# Altium PCB USBPhyRW20180110.PcbDoc
Units mil, origin at the board's own origin, x right, y up, seen from the top; angles counter-clockwise.
Board outline 2170 x 955 mil, 2 copper layers (Top Layer, Bottom Layer); 40 components, 26 nets, 144 pads, 49 vias.
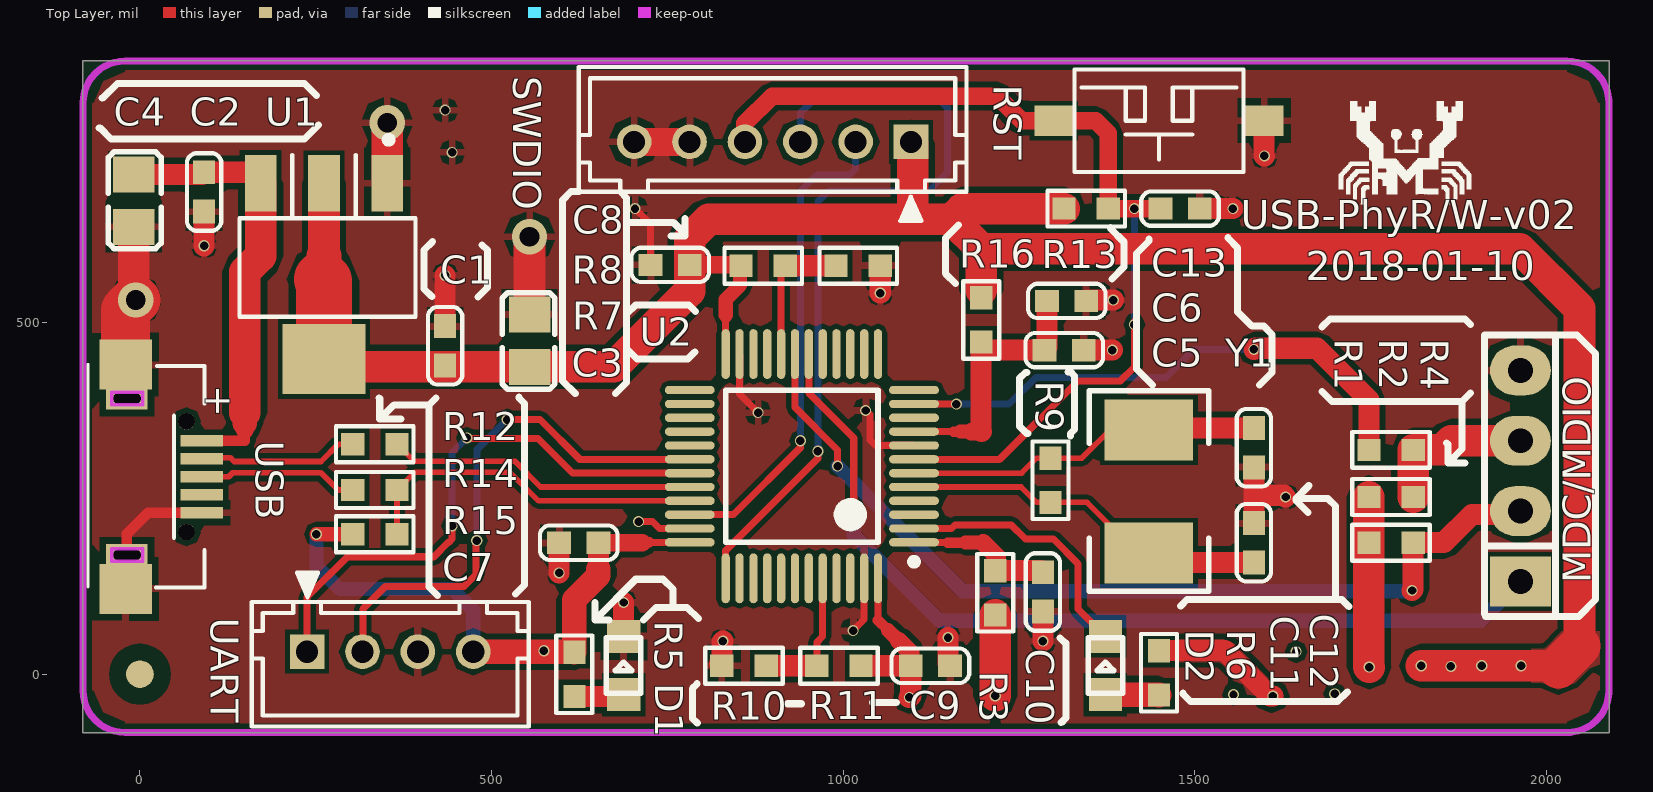
[diagram p0: Top Layer view]
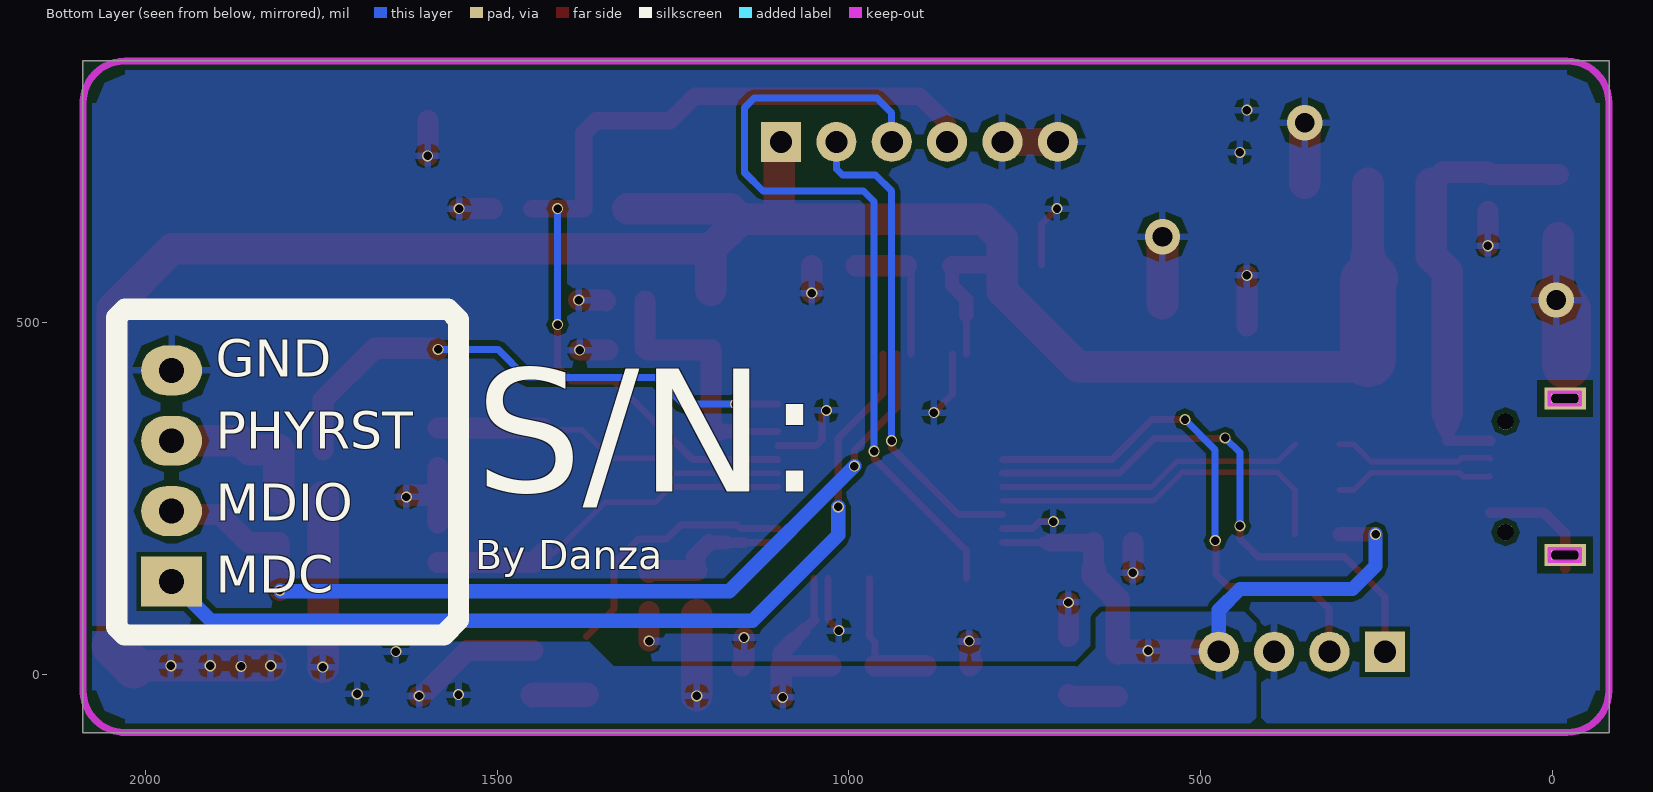
[diagram p1: Bottom Layer view, seen from below]

## Layer stack, top to bottom
Top Solder: solder mask 0.4, Solder Resist, Dk 3.5
Top Layer: signal copper 1.4
Dielectric 1: dielectric 12.6, FR-4, Dk 4.8
Bottom Layer: signal copper 1.4
Bottom Solder: solder mask 0.4, Solder Resist, Dk 3.5

## Board outline
754,872 2089,872 2089,-63 2089,-73 2089,-83 -81,-83 -81,862 -81,872

## Design rules (kind name [scope] priority, off if disabled: settings)
Clearance [All] p1: gap=7
ComponentClearance [All] p1: gap=3 collisioncheckmode=3 verticalgap=7 showdistances=FALSE
DiffPairsRouting [All] p1: maxlimit=8 minlimit=8 mostfreqgap=8 toplayer_minwidth=8 toplayer_maxwidth=30 toplayer_prefwidth=15 bottomlayer_minwidth=8 bottomlayer_maxwidth=30 bottomlayer_prefwidth=15 maxuncoupledlength=500
PolygonConnect [All] p1: connectstyle=Relief reliefconductorwidth=10 reliefentries=4 polygonreliefangle="90 Angle" airgapwidth=10
RoutingVias [All] p1: holewidth=28 width=50 viastyle="Through Hole" minholewidth=10 minwidth=10 maxholewidth=100 maxwidth=100
SilkToSilkClearance [All] p1 off: silktosilkclearance=10
SolderMaskExpansion [All] p1: expansion=4
Width [All] p1: maxlimit=100 minlimit=8 preferedwidth=10 minimp=50.000000 maximp=50.000000 favimp=50.000000
27 further rules are at their usual default settings.

## Classes and differential pairs
component class CoreBoard: C1 C2 C3 C4 C5 C6 C7 C8 C9 C10 C11 C12 C13 D1 D2 MDC/MDIO/RST#/GND R1 R2 R3 R4 R5 R6 R7 R9 R10 R12 R13 R14 r16 RST SWDIO U1 UART USB Y1
differential pair USB_1: +NetR12_2 -NetR14_2
differential pair USB_2: +DM_PA11 -DP_PA12
differential pair CLK8M: +OSC_OUT -OSC_IN

## Components (designator, comment, footprint, x,y, rotation, side; value= is the part's Value field where it differs from the comment)
C1 "0.1uf" C0603 434,467 r90 top
C2 "0.1uf" C0603 91.24,685.74 r270 top
C3 "10uf" CAP-0805 554,437 r90 top
C4 "10uf" CAP-0805 -8.76,710.74 r270 top
C5 "1uf" C0603 1314.2,460.74 r0 top
C6 "0.1uf" C0603 1317.74,530.74 r0 top
C7 "0.1uf" C0603 624,187 r180 top
C8 "0.1uf" C0603 754,582 r180 top
C9 "0.1uf" C0603 1124,12 r0 top
C10 "0.1uf" C0603 1284,117 r270 top
C11 "20pF" C0603 1584,187 r90 top
C12 "20pF" C0603 1584,322 r90 top
C13 "0.1uf" C0603 1479,662 r180 top
D1 "LED-GREEN" LED-0805 687.74,9.76 r270 top
D2 "LED-GREEN" LED-0805 1372.74,9.76 r270 top
MDC/MDIO "CN_UART" SIP4P-2.54mm 1963,132 r0 top (schematic designator CN3)
R1 "1.5K/NC" R0603 1779,187 r180 top
R2 "50k/NC" R0603 1779,252 r0 top
R3 "0R/NC" R0603 1216.24,115.74 r270 top
R4 "0R" R0603 1779,319 r0 top
R5 "1K" R0603 617.74,-0.24 r270 top
R6 "1K" R0603 1449,2 r270 top
R7 "10K" R0603 1021.24,580.82 r180 top
R8 "10K/NC" R0603 886.24,580.82 r180 top
R9 "1M" R0603 1294.75,275.74 r270 top
R10 "10K" R0603 859,12 r0 top
R11 "10K/NC" R0603 994,12 r0 top
R12 "20R" R0603 334,327 r180 top
R13 "10K" R0603 1345.5,662 r180 top
R14 "20R" R0603 334,262 r180 top
R15 "4K7" R0603 334,199 r0 top
R16 "0R" R0603 1196.24,503.74 r270 top (schematic designator L1)
RST "KEYPAD/NC" SWITCH_T06B 1449,787 r180 top (schematic designator SW1)
SWDIO "DNP/NC" CON_SIP6BOX_2MM 1096.48,758.97 r180 top (schematic designator SWD)
U1 "LM1117-3.3V" SOT-223 269,577 r180 top
U2 "STM32F101C8T6" LQFP48_N 941.24,295.74 r180 top
UART "CN_UART/NC" CON_SIP4BOX_2MM 237.78,30.03 r0 top (schematic designator CN1)
USB "MICROUSB" MICRO-USB 1.24,280.74 r270 top
Y1 "8M" 5032-2P 1434.75,260.74 r270 top
? "Comment" MARK 0,0 r270 top

## Footprints (in the part's own frame and the unit in brackets; to place one, negate y for a bottom-side part, rotate by r counter-clockwise, add the part's x,y. Pads: shape width x height; smd on the part's side, far side on the other; paste and mask are expansions set on the pad)
5032-2P [mm]
  rect 2.2x3.2 smd: 1(-2.2,0) 2(2.25,0)
  silkscreen extent -3.62,-2.16 3.62,2.16
C0603 [mm]
  rect 0.86x0.8 smd: 1(-0.71,0) 2(0.71,0)
  silkscreen extent -1.4,-0.62 1.4,0.62
CAP-0805 [mm]
  rect 1.3x1.5 smd: 1(0,0) 2(1.9,0)
  silkscreen extent -0.82,-0.91 2.68,0.99
CON_SIP4BOX_2MM [mm]
  rect 1.25x1.25 / inner rect 1.25x1.25 / far side rect 1.45x1.45 hole 0.8: 1(0,0.05)
  round 1.25 / inner round 1.25 / far side round 1.45 hole 0.8: 2(2,0.05) 3(4,0.05) 4(6,0.05)
  silkscreen extent -2,-2.65 8,2.91
CON_SIP6BOX_2MM [mm]
  rect 1.25x1.25 / inner rect 1.25x1.25 / far side rect 1.45x1.45 hole 0.8: 1(0,0.05)
  round 1.25 / inner round 1.25 / far side round 1.45 hole 0.8: 2(2,0.05) 3(4,0.05) 4(6,0.05) 5(8,0.05) 6(10,0.05)
  silkscreen extent -2,-2.65 12,2.91
LED-0805 [mm]
  rect 1.2x1.2 smd: 1(-1.116,0.003) 2(0.984,0.003)
  silkscreen extent -1.07,-0.62 0.93,0.63
LQFP48_N [mm]
  oval 1.8x0.3 smd: 1(-4.05,2.75) 2(-4.05,2.25) 3(-4.05,1.75) 4(-4.05,1.25) 5(-4.05,0.75) 6(-4.05,0.25) 7(-4.05,-0.25) 8(-4.05,-0.75) 9(-4.05,-1.25) 10(-4.05,-1.75) 11(-4.05,-2.25) 12(-4.05,-2.75) 25(4.05,-2.75) 26(4.05,-2.25) 27(4.05,-1.75) 28(4.05,-1.25) 29(4.05,-0.75) 30(4.05,-0.25) 31(4.05,0.25) 32(4.05,0.75) 33(4.05,1.25) 34(4.05,1.75) 35(4.05,2.25) 36(4.05,2.75)
  oval 0.3x1.8 smd: 13(-2.75,-4.05) 14(-2.25,-4.05) 15(-1.75,-4.05) 16(-1.25,-4.05) 17(-0.75,-4.05) 18(-0.25,-4.05) 19(0.25,-4.05) 20(0.75,-4.05) 21(1.25,-4.05) 22(1.75,-4.05) 23(2.25,-4.05) 24(2.75,-4.05) 37(2.75,4.05) 38(2.25,4.05) 39(1.75,4.05) 40(1.25,4.05) 41(0.75,4.05) 42(0.25,4.05) 43(-0.25,4.05) 44(-0.75,4.05) 45(-1.25,4.05) 46(-1.75,4.05) 47(-2.25,4.05) 48(-2.75,4.05)
  silkscreen extent -4.18,-2.75 2.75,3.57
MARK [mm]
  round 1 smd paste-1.016 mask+0.5: ""(0,0)
  Top Layer pour cut-out: -1.109,0 -1.072,-0.287 -0.961,-0.555 -0.785,-0.785 -0.555,-0.961 -0.287,-1.072 0,-1.109 0,-1.109 0.287,-1.072 0.555,-0.961 0.785,-0.785 0.961,-0.555 1.072,-0.287 1.109,0 1.109,0 1.072,0.287 0.961,0.555 0.785,0.785 0.555,0.961 0.287,1.072 0,1.109 0,1.109 -0.287,1.072 -0.555,0.961 -0.785,0.785 -0.961,0.555 -1.072,0.287 -1.109,0
MICRO-USB [mm]
  rect 0.4x1.55 smd: 1(-1.3,2.2) 2(-0.65,2.2) 3(0,2.2) 4(0.65,2.2) 5(1.3,2.2)
  rect 1.8x1.9 smd: 6(-4.05,-0.55) 6(4.05,-0.55)
  rect 0.8x1.5 hole 0.4 slot 1 at 90 deg: 6(-2.825,-0.5) 6(2.825,-0.5)
  round 0.6 hole 0.6 unplated: ""(-2,1.65) ""(2,1.65)
  Keep-Out Layer lines w0.127: 3.054,-1.043 2.596,-1.043 2.596,0.075 3.054,0.075 3.054,-1.043 ; -2.596,-1.043 -3.054,-1.043 -3.054,0.075 -2.596,0.075 -2.596,-1.043
  silkscreen extent -4.06,-1.91 4,2.3
R0603 [mm]
  rect 0.84x0.8 smd: 1(-0.8,0) 2(0.8,0)
  silkscreen extent -1.4,-0.65 1.4,0.65
SIP4P-2.54mm [mm]
  rect 2.2x1.8 hole 0.9: 1(0,0)
  oval 2.2x1.8 hole 0.9: 2(0,2.54) 3(0,5.08) 4(0,7.62)
  silkscreen extent -1.29,-1.27 1.27,8.9
SOT-223 [mil]
  rect 45x80 smd: 1(-82.76,-121.26) 2(7.24,-121.26) 3(97.24,-121.26)
  rect 118x100 smd: 4(7.24,128.74)
  silkscreen extent -123,-188 127,69
SWITCH_T06B [mm]
  rect 1.4x1.1 smd: 1(-3.8,0) 2(3.8,0)
  silkscreen extent -3.05,-1.85 3.05,1.85

## Part data
C1 C2 C5 C6 C7 C8 C9 C10 C13: library part CAP_1, "Capacitor"
C3 C4: library part CAPACITOR, "Capacitor"
C11 C12: library part CAP, "Capacitor"
D1 D2: library part LED
MDC/MDIO UART: library part CON4
R1 R2 R3 R4 R5 R6 R7 R8 R9 R10 R11 R12 R13 R14: library part RES1
R16: library part INDUCTOR1
RST: library part PUSHBUTTON_TSKB-2L_0
SWDIO: library part CON6
U1: library part LM1117
U2: "STM32 ARM-based 32-bit MCU with 64 Kbytes Flash, 48-pin LQFP, Industrial Temperature"
Y1: library part CRYSTAL, "Crystal"

## Via types
v1: diameter 15.75, hole 12, Top Layer to Bottom Layer, 46 vias
v2: diameter 50, hole 28, Top Layer to Bottom Layer, 3 vias

## Nets (pads, with @x,y where several pads share a name; then routed paths per layer and width w, separated by ;. In a path a pad name is that pad's centre, name@x,y a point inside that pad or via, vN(x,y) a via of type N, cw(c..) or ccw(c..) an arc to the next point about the centre after c; other vN are vias at no path point)
BOOT0: R10.2 R11.1 U2.44 | length 199.7
  Top Layer w10: R11.1 962.5,45.5 970.77,53.77 U2.44
  Top Layer w30: R10.2 R11.1
BOOT1: R7.2 R8.1 U2.20 | length 200.1
  Top Layer w10: U2.20 911.72,574.8 R8.1
  Top Layer w30: R8.1 R7.2
DM_PA11: R12.1 U2.32 | length 441.5
  Top Layer w8: R12.1 389.5,303 533,303 569.79,266.21 U2.32
DP_PA12: R14.1 R15.2 U2.33 | length 506.4
  Top Layer w8: R15.2 R14.1 390.5,287 526.37,287 566.84,246.53 U2.33
GND: C1.2 C2.2 C3.2 C4.2 C5.2 C6.2 C7.2 C8.2 C9.2 C10.2 C11.2 C12.1 C13.1 D1.1 MDC/MDIO.4 R7.1 R10.1 RST.1 SWDIO.5 SWDIO.6 U1.1 U2.8 U2.23 U2.35 U2.47 UART.3 USB.5 USB.6 | length 1742.8
  Top Layer w10: v1(704,662) 726.05,639.95 C8.2 ; v1(709,217) 729,217 738.84,207.16 U2.35 ; U2.23 852.66,398.34 v1(879,372) ; v1(1014,62) 1029.83,77.83 U2.47 ; v1(1032,375) 1038,369 1038,333 1045.73,325.27 U2.8
  Top Layer w15: USB.6@-18.44,150.52 -18.44,169.52 -18.44,199.56 11.56,229.56 USB.5
  Top Layer w30: v1(91.24,609.24) C2.2 ; C1.2 v1(434,567) ; v1(596.05,144.05) C7.2 ; D1.1 v1(687.86,102) ; R10.1@824,15.5 R10.1 827.5,45.5 v1(829,47) ; v1(1052.74,542) R7.1 ; v1(1149,52) 1149,14.95 C9.2 ; v1(1284,47) C10.2 ; C5.2 v1(1382.74,460.74) ; C6.2 1346.95,532 v1(1384,532) ; C13.1 v1(1554,662) ; C11.2 1584,254.5 ; C12.1 1584,254.5 ; RST.1 1598.61,737.39 v1(1599,737) ; v1(1629,252) 1626.5,254.5 1584,254.5
  Top Layer w40: SWDIO.6 SWDIO.5
  Top Layer w45: C4.2@-8.76,620.74 -8.76,534.76 v2(-6,532) ; U1.1 v2(351.76,784.24) ; C3.2@554,527 v2(554,622)
  Top Layer w70: USB.6@-20.41,440.19 -20.41,517.59 v2(-6,532)
  other v1: 444,742 434,802
NetD1_2: D1.2 R5.2 | length 71.3
  Top Layer w30: R5.2 685.1,-31.74 D1.2
NetD2_2: D2.2 R6.2 | length 76.4
  Top Layer w35: D2.2 1448.49,-28.98 R6.2
NetQ1_1: 
NetR12_2: R12.2 USB.2 | length 227.8
  Top Layer w8: USB.2 89.53,308 128.5,308 134,302.5 257.47,302.5 281.97,327 R12.2
NetR14_2: R14.2 USB.3 | length 229
  Top Layer w8: USB.3@89.12,282 USB.3 126.24,280.74 132,286.5 257.47,286.5 281.97,262 R14.2
NRST: C13.2 R13.1 RST.2 SWDIO.4 U2.7 | length 1359.8
  Top Layer w10: U2.7 1222.58,305.58 1334,417 1394,417 1414,437 v1(1414,497) v1@1414,502
  Top Layer w25: SWDIO.4 860.26,783.26 899,822 1219,822 1254,787 RST.2 1359,787 1376.99,769.01 R13.1 v1(1414.02,662) C13.2
  Bottom Layer w10: v1(1414,497) v1(1414.02,662)
OSC_IN: C11.1 R9.2 U2.5 Y1.2 | length 527.7
  Top Layer w8: U2.5 1253.03,266.21 1275,244.24 R9.2 1346.76,244.24 1418.84,172.16 Y1.2
  Top Layer w30: Y1.2 1447.86,159.05 C11.1
OSC_OUT: C12.2 R9.1 U2.6 Y1.1 | length 509.8
  Top Layer w8: U2.6 1253.66,285.9 1275,307.24 R9.1 1339.24,307.24 1379.35,347.35 Y1.1
  Top Layer w30: Y1.1 1437.35,349.95 C12.2
PC13: D2.1 U2.2 | length 377.5
  Top Layer w10: U2.2 1154.16,207.16 1159,212 1239,212 1259,192 1299,192 1334,157 1334,92.55 D2.1
PHYRST: R4.1 U2.11 | length 781.5
  Top Layer w10: U2.11 v1@1161.32,384.32
  Top Layer w30: v1(1584,462) 1585.5,463.5 1674,463.5 1747.5,389.99 R4.1
  Bottom Layer w10: v1(1161,384) 1236,384 1274,422 1459,422 1499,462 v1(1584,462)
PHYRST#: MDC/MDIO.3 R2.2 R4.2 | length 229.5
  Top Layer w45: R2.2 R4.2 ; R4.2@1813.76,315.74 R4.2 ; MDC/MDIO.3 1865,332 1852,319 R4.2
RX1: U2.31 UART.1 | length 808.3
  Top Layer w10: UART.1 237.78,109.78 295,167 418,167 439,188 440,188 444,192 v1(444,211) ; v1(465,336) 466,335 566,335 615.1,285.9 U2.31
  Bottom Layer w10: v1(444,211) 444,315 v1(465,336)
SMIMDC: MDC/MDIO.1 U2.18 | length 1305.4
  Top Layer w10: U2.18 951.09,399.91 1015,336 v1(1015,238)
  Bottom Layer w20: v1(1015,238) 1015,198 1137,76 1907,76 MDC/MDIO.1
SMIMDIO: MDC/MDIO.2 R1.1 U2.19 | length 1315.2
  Top Layer w10: U2.19 931.4,379.6 992,319 v1(992,296)
  Top Layer w30: v1(1809,119) 1810.5,120.5 R1.1 1854,187 1894,227 1958,227 MDC/MDIO.2
  Bottom Layer w20: v1(992,296) 1170,118 1808,118 v1(1809,119)
SWCLK: SWDIO.3 U2.37 | length 1148
  Top Layer w10: U2.37 832.98,175.98 964,307 v1(964,317)
  Bottom Layer w10: SWDIO.3 939,798 960,819 1135,819 1148,806 1148,713 1122,687 979.1,687 964,671.9 v1(964,317)
SWDIO: SWDIO.2 U2.34 | length 691.9
  Top Layer w10: U2.34 843.84,226.84 939,322 v1(939,332)
  Bottom Layer w10: v1(939,332) 939,687 962,710 1009.21,710 1017.74,718.53 SWDIO.2
TX1: U2.30 UART.2 | length 763.9
  Top Layer w10: UART.2 317,32.48 317,93 349,125 461,125 478,142 478,189 v1(479,190) ; v1(522,362) 569,362 625.42,305.58 U2.30
  Bottom Layer w10: v1(479,190) 479,319 v1(522,362)
USB_5V: C2.1 C4.1 U1.3 USB.1 | length 625
  Top Layer w15: USB.1 148.92,331.92 148.92,346.92
  Top Layer w25: 148.92,346.92 148.92,356.92
  Top Layer w30: C4.1 88.29,710.74 C2.1 156.32,713.69 U1.3
  Top Layer w35: 148.92,356.92 148.92,371.92
  Top Layer w45: 148.92,371.92 148.92,426.92 149,427 149,572 171.76,594.76 U1.3
VBAT: C10.1 R3.1 U2.1 | length 216.4
  Top Layer w10: U2.1 1101.17,187 1149,187
  Top Layer w15: 1149,187 1174,187
  Top Layer w20: 1174,187 1199,187
  Top Layer w25: 1199,187 1219,167 1216.24,164.24 R3.1
  Top Layer w30: R3.1 1281.72,147.24 C10.1
VCC_3V3: C1.1 C3.1 C7.1 C8.1 C9.1 R1.2 R2.1 R3.2 R5.1 R6.1 R8.2 R11.2 R13.2 R15.1 R16.1 SWDIO.1 U1.2 U1.4 U2.24 U2.36 U2.48 UART.4 | length 5143.4
  Top Layer w10: 724.47,187.47 U2.36 ; U2.24 832.98,505.98 ; 1049.51,77 U2.48
  Top Layer w15: 714.47,187.47 724.47,187.47 ; 832.98,505.98 832.98,510.98 ; 1049.51,77 1064,62.51
  Top Layer w20: v1(251,199) R15.1 ; 714,187 714.47,187.47 ; 832.98,510.98 832.98,532.98 853.57,553.57 R8.2@853.57,582 ; 1064,62.51 1079,47.51
  Top Layer w25: C7.1 714,187 ; C8.1 853.57,582 R8.2 ; 1079,47.51 1096.05,30.46 C9.1
  Top Layer w30: 651.95,149.05 C7.1 ; R11.2 C9.1 1096.05,-30.95 v1(1094,-33) ; R6.1 1542.5,33.5 1607,-31 v1(1611,-31)
  Top Layer w35: UART.4 616.99,32 R5.1 617.74,105.74 651.95,139.95 651.95,149.05
  Top Layer w45: U1.4 273.02,437 C3.1 674,437 781.95,544.95 C8.1 781.95,619.95 809,647 1099,647 ; 261.76,594.76 U1.2 ; SWDIO.1 1099,754.48 1099,647 ; R16.1@1196.24,545.74 1196.24,604.76 ; v1(1216.24,-30.76) R3.2 ; R13.2 1169,662 1154,647 ; R2.1 R1.2 1747.5,10.5 v1(1748,10) ; v1(1822,12) v1(1908,12) v1(1964,12) 2015,12 2017,10 ; 2047,40 2047,520 1962.24,604.76 1196.24,604.76 ; 1099,647 1154,647 ; 1154,647 1196.24,604.76
  Top Layer w50: 261.76,564.24 261.76,594.76
  Top Layer w55: 259,561.49 261.76,564.24
  Top Layer w60: 2017,10 2047,40
  Top Layer w80: 259,561.49 261.76,558.73 U1.4
  Bottom Layer w20: v1(251,199) 251,154 284,121 444,121 474,91 UART.4
  other v1: 1555,-29 1699,-28 1864,11 1644,32 574.4,33.32
VDDA: C5.1 C6.1 R16.2 U2.9 | length 375.2
  Top Layer w10: U2.9 1156.95,344.95
  Top Layer w15: 1156.95,344.95 1166.95,344.95
  Top Layer w20: 1166.95,344.95 1181.95,344.95
  Top Layer w25: 1181.95,344.95 1196.95,344.95
  Top Layer w30: 1196.95,344.95 1196.24,345.66 1196.24,461.74 1197.24,460.74 C5.1 1289.79,464.28 C6.1
pads on no net: ?. U2.3 U2.4 U2.10 U2.12 U2.13 U2.14 U2.15 U2.16 U2.17 U2.21 U2.22 U2.25 U2.26 U2.27 U2.28 U2.29 U2.38 U2.39 U2.40 U2.41 U2.42 U2.43 U2.45 U2.46 USB. USB.4

## Polygon pours and split planes (outlines as drawn)
VCC_3V3 on Top Layer "VCC_3V3_L01_P018" (solid, remove dead copper, pour order 18): 1448.33,57.03 1448,56.7 1448,-70 2042,-70 2077,-35 2077,61 1452.69,61 1449,57.31
VCC_3V3 on Top Layer "VCC_3V3_L01_P016" (solid, remove dead copper, pour order 16): 1610,56 1613,59 2030,59 2068,59 2076,51 2077,50 2077,-35 2075,-35 2040,-70 2036,-74 1848,-74 1612,-74 1610,-72
GND on Top Layer "GND_L01_P010" (solid, remove dead copper, pour order 10): -81,872 -81,-83 2089,-83 2089,-77 2089,872 1933,872 -81,872
GND on Bottom Layer "GND_L02_P014" (solid, remove dead copper, pour order 14): 2090,-83 2090,871 2089,872 -81,872 -81,-83 2090,-83
VCC_3V3 on Bottom Layer "VCC_3V3_L02_P012" (solid, remove dead copper, pour order 12): 2084,61 1912,61 1897,46 1671,46 1369,46 1337,14 1334,11 1227,11 677,11 676,10 649,37 649,49 649,80 648,81 640,89 489,89 438,89 427,78 421,72 421,-15 421,-62 439,-80 440,-81 1325,-81 2083,-81

## Keep-outs
Keep-Out Layer:
  lines w10: 2029,-83 ccw(c2029,-23) 2089,-23 ; 2034,-83 -6,-83 -21,-83 cw(c-21,-23) -81,-23 -81,-8 -81,812 cw(c-21,812) -21,872 2029,872 cw(c2029,812) 2089,812 ; 2089,-28 2089,817

## Silkscreen, mask and mechanical layers (free items; w line width, h text height)
Top Overlay:
  drawing of 797 lines, arcs and shapes, not listed
  text "USB-PhyR/W-v02" at 1565,619 h70
  text "2018-01-10" at 1658,547 h70
Bottom Overlay:
  lines w30: 1993,519 2029,519 2041,507 2041,67 2030,56 1576,56 1555,77 1555,504 1570,519 2011,519
  text "GND" at 1900.2,405 h90
  text "PHYRST" at 1900.2,302.7 h90
  text "S/N:" at 1531,202 h300
  text "MDIO" at 1900.2,200.39 h90
  text "By Danza" at 1531,136 h70
  text "MDC" at 1900.2,98 h90

## Text inside footprints (layer, text, board x,y; h text height)
USB: Top Overlay "+" at 93.76,410.66 h39.37 r270